# Altium PCB PCB1.PcbDoc
Units mm, origin at the board's own origin, x right, y up, seen from the top; angles counter-clockwise.
Board outline 85 x 40 mm, 2 copper layers (Top Layer, Bottom Layer); 43 components, 47 nets, 189 pads, 27 vias.
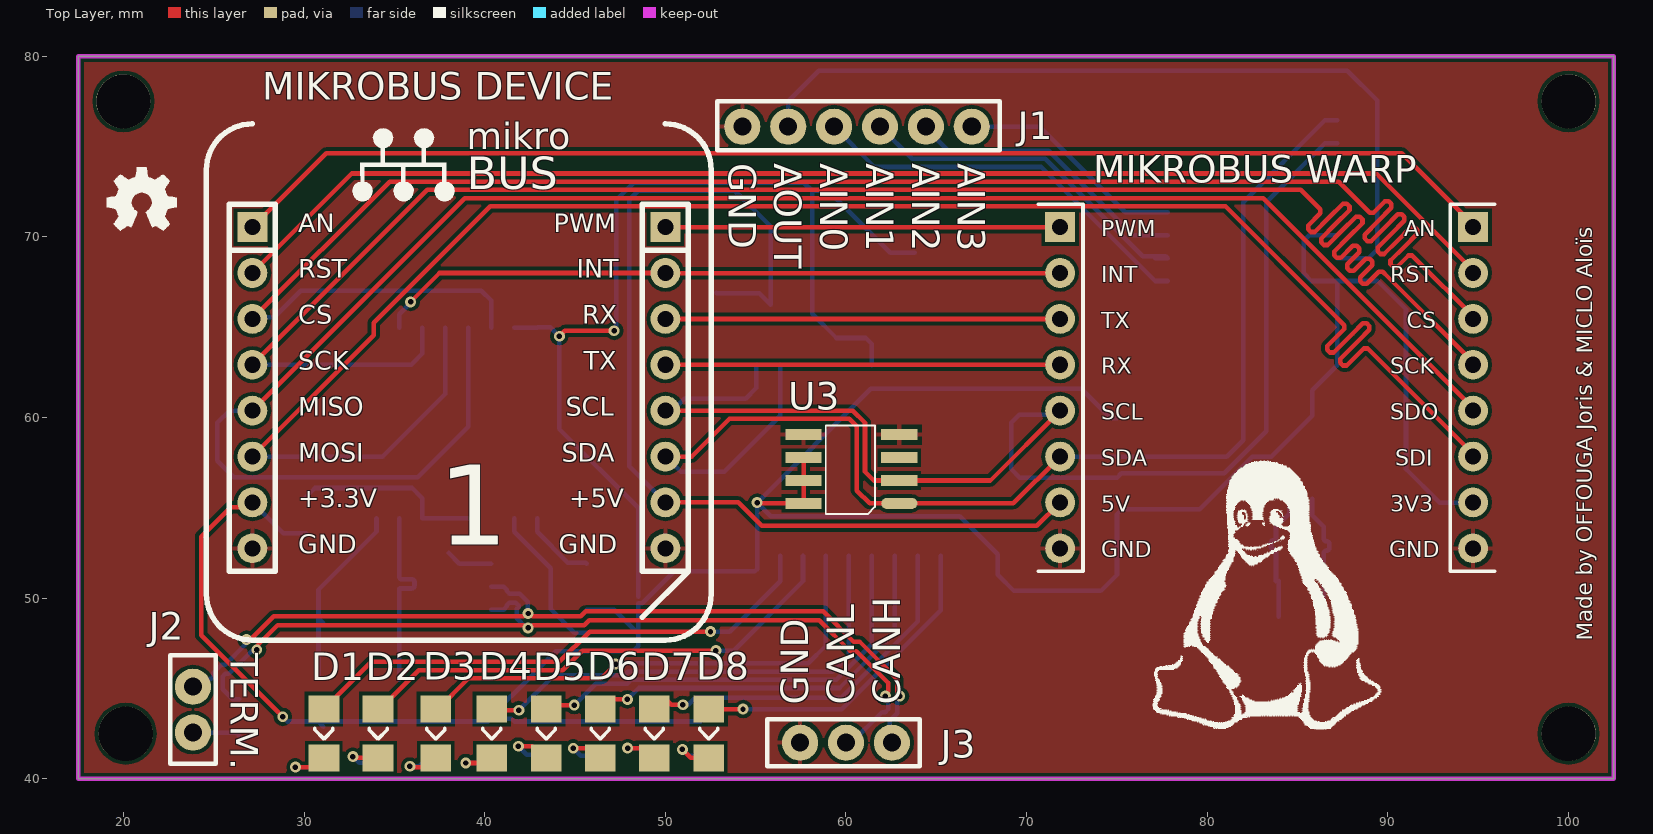
[diagram p0: Top Layer view]
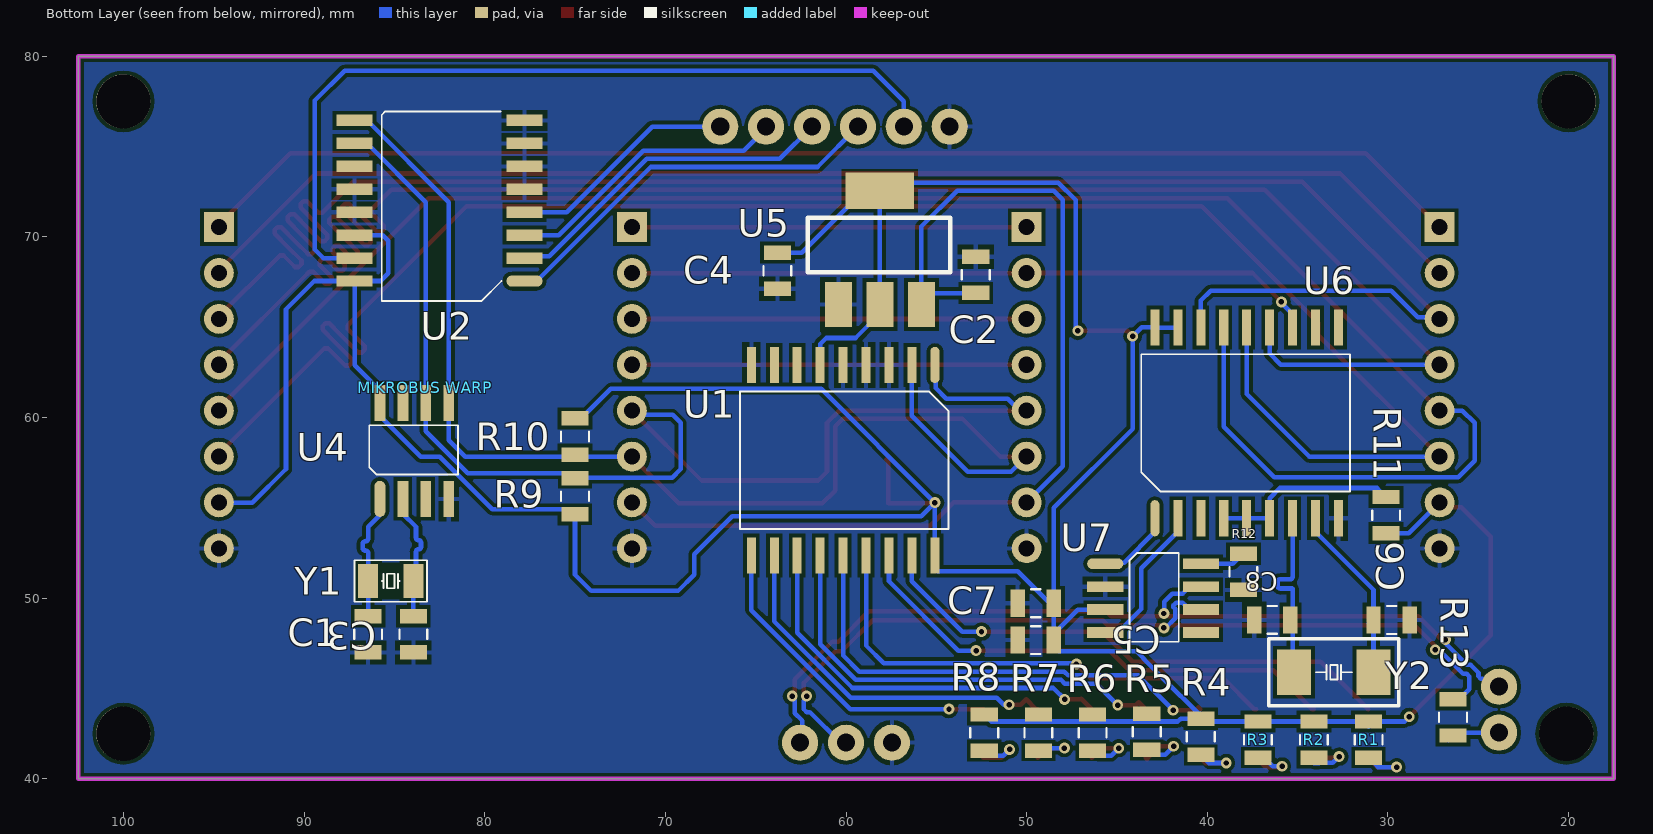
[diagram p1: Bottom Layer view, seen from below]

## Layer stack, top to bottom
Top Solder: solder mask 0.0102, Solder Resist, Dk 3.5
Top Layer: signal copper 0.0356
Dielectric 1: dielectric 0.32, FR-4, Dk 4.8
Bottom Layer: signal copper 0.0356
Bottom Solder: solder mask 0.0102, Solder Resist, Dk 3.5

## Board outline
17.5,40 17.5,80 102.5,80 102.5,40

## Design rules (kind name [scope] priority, off if disabled: settings)
Clearance [All] p1: gap=0.2 ignorepadtopadclearanceinfootprint=FALSE
DiffPairsRouting [All] p1: maxlimit=0.254 minlimit=0.254 mostfreqgap=0.254 toplayer_minwidth=0.25 toplayer_maxwidth=0.381 toplayer_prefwidth=0.25 bottomlayer_minwidth=0.25 bottomlayer_maxwidth=0.381 bottomlayer_prefwidth=0.25 maxuncoupledlength=12.7
HoleSize [All] p1: absolutevalues=TRUE maxlimit=5.5 minlimit=0.025 maxpercent=80.000 minpercent=20.000
MatchedLengths SPI_Length [InNetClass('SPI')] p1: tolerance=1 checknetsindiffpair=FALSE checkdiffpairvsdiffpair=TRUE checkxsignals=TRUE checkothers=TRUE
MatchedLengths QUARTZ_8M_Length [InNetClass('QUARTZ_8M')] p2: tolerance=0.1 checknetsindiffpair=FALSE checkdiffpairvsdiffpair=TRUE checkxsignals=TRUE checkothers=TRUE
MatchedLengths CAN [InNetClass('CAN')] p3: tolerance=0.1 checknetsindiffpair=FALSE checkdiffpairvsdiffpair=TRUE checkxsignals=TRUE checkothers=TRUE
MinimumSolderMaskSliver [All] p1: minsoldermaskwidth=0.05
PolygonConnect [All] p1: connectstyle=Relief reliefconductorwidth=0.254 reliefentries=4 polygonreliefangle="90 Angle" airgapwidth=0.254
RoutingVias [All] p1: holewidth=0.3 width=0.6 viastyle="Through Hole" minholewidth=0.3 minwidth=0.6 maxholewidth=0.3 maxwidth=0.6
SilkToSilkClearance [All] p1: silktosilkclearance=0.15
SilkToSolderMaskClearance [IsPad] p1: minsilkscreentomaskgap=0.1 clearancetoexposedcopper=TRUE
SolderMaskExpansion [All] p1: expansion=0.102
Width [All] p1: maxlimit=5 minlimit=0.254 preferedwidth=0.254
25 further rules are at their usual default settings.

## Classes and differential pairs
net class CAN: CAN_N CAN_P
net class QUARTZ_8M: NetC1_1 NetC3_1 OSC1 OSC2
net class UART: RX TX
net class SPI: CS MISO MOSI SCK
net class I2C: SCL SDA
differential pair CAN: +CAN_P -CAN_N

## Components (designator, comment, footprint, x,y, rotation, side; value= is the part's Value field where it differs from the comment)
C1 "6pF" 0805 86.45,48 r270 bottom
C2 "10uF" 0805 52.815,67.9 r90 bottom
C3 "6pF" 0805 83.95,48 r270 bottom
C4 "10uF" 0805 63.8,68.127 r270 bottom
C5 "18nF" 0805 49.5,47.68 r0 bottom
C6 "18pF" 0805 29.8,48.793 r0 bottom
C7 "100nF" 0805 49.5,49.72 r180 bottom
C8 "18pF" 0805 36.4,48.8 r180 bottom
D1 "Diode" LED 31.1,42.51 r90 top
D2 "Diode" LED 34.1,42.51 r90 top
D3 "Diode" LED 37.299,42.51 r90 top
D4 "Diode" LED 40.396,42.51 r90 top
D5 "Diode" LED 43.4,42.51 r90 top
D6 "Diode" LED 46.392,42.51 r90 top
D7 "Diode" LED 49.392,42.51 r90 top
D8 "Diode" LED 52.408,42.51 r90 top
J1 "Header_6" "HEADER 6" 60.61,76.1 r180 top
J2 "Jumper" "HEADER 2" 23.85,43.83 r270 top
J3 "Header_3" "HEADER 3" 60,42 r180 top
"MIKROBUS DEVICE" "MIKROBUS HOST CONN." "MIKROBUS HOST CONN." 27.14,70.54 r0 top
"MIKROBUS WARP" "MIKROBUS HOST CONN." "MIKROBUS WARP CONN." 94.71,70.54 r180 bottom
R1 "100R" 0805 31.073,42.173 r90 bottom
R2 "100R" 0805 34.1,42.173 r90 bottom
R3 "100R" 0805 37.2,42.173 r90 bottom
R4 "100R" 0805 40.36,42.327 r90 bottom
R5 "100R" 0805 43.35,42.6 r90 bottom
R6 "100R" 0805 46.35,42.56 r90 bottom
R7 "100R" 0805 49.35,42.56 r90 bottom
R8 "100R" 0805 52.35,42.56 r90 bottom
R9 "22K" 0805 75,55.65 r270 bottom
R10 "22K" 0805 75,58.95 r90 bottom
R11 "100K" 0805 30.107,54.6 r270 bottom
R12 "10R" 0805 38,51.46 r90 bottom
R13 "100R" 0805 26.4,43.4 r270 bottom
U1 "MCP23008" "SOIC 18" 60.16,57.634 r0 bottom
U2 "PCF8591T/2" "SOIC 16" 82.5,72 r90 bottom
U3 "LM75AD" "SOIC 8" 60.3,57.15 r90 top
U4 "MCP79410N" "SOIC 8" 83.895,58.15 r180 bottom
U5 "NCP1117LPST33T3G" SOT-223 58.124,69.4 r180 bottom
U6 "MCP2515" "SOIC 18" 37.82,59.7 r180 bottom
U7 "MCP2551" "SOIC 8" 43,50 r270 bottom
Y1 "32.768Khz" ABS-07 85.2,50.95 r180 bottom
Y2 "8MHz" QUARTZ_CMS_6.2x3.7 32.999,45.9 r0 bottom

## Footprints (in the part's own frame and the unit in brackets; to place one, negate y for a bottom-side part, rotate by r counter-clockwise, add the part's x,y. Pads: shape width x height; smd on the part's side, far side on the other; paste and mask are expansions set on the pad)
0805 [mm]
  rect 0.8x1.5 smd: 1(-1,0) 2(1,0)
  silkscreen extent -0.26,-0.77 0.26,0.77, body extent -0.97,-0.62 1.03,0.63, height 0.61
ABS-07 [mm]
  rect 1.1x1.9 smd: 1(-1.25,0) 2(1.25,0)
  Top Layer pour cut-out: -0.6,1 0.6,1 0.6,-1 -0.6,-1
  silkscreen extent -2,-1.15 2,1.15, body extent -1.61,-0.76 1.61,0.76, height 0.91
"HEADER 2" [mm]
  round 2 hole 1: 1(-1.27,0) 2(1.27,0)
  silkscreen extent -3,-1.26 3,1.27, body extent -2.54,-1.27 2.54,1.27, height 9.27
"HEADER 3" [mm]
  round 2 hole 1: 1(-2.54,0) 2(0,0) 3(2.54,0)
  silkscreen extent -4.09,-1.3 4.35,1.3, body extent -3.81,-1.27 3.81,1.27, height 8.77
"HEADER 6" [mm]
  round 2 hole 1: 1(-6.35,0) 2(-3.81,0) 3(-1.27,0) 4(1.27,0) 5(3.81,0) 6(6.35,0)
  silkscreen extent -7.9,-1.4 7.74,1.3, body extent -7.42,-9.61 7.42,0.4, height 2.5
LED [mm]
  rect 1.5x1.7 smd: 1(-1.35,0) 2(1.35,0)
  silkscreen extent -0.3,-0.5 0.3,0.5, body extent -1.6,-0.8 1.6,0.8, height 0.62
"MIKROBUS HOST CONN." [mil]
  rect 65x65 hole 35: 1(0,0) 16(900,0)
  round 65 hole 35: 2(0,-100) 3(0,-200) 4(0,-300) 5(0,-400) 6(0,-500) 7(0,-600) 8(0,-700) 9(900,-700) 10(900,-600) 11(900,-500) 12(900,-400) 13(900,-300) 14(900,-200) 15(900,-100)
  silkscreen extent -100,-900 1000,225, body extent -49,-755 949,55, height 335
"MIKROBUS WARP CONN." [mil]
  rect 65x65 hole 35: 1(0,0) 16(900,0)
  round 65 hole 35: 2(0,-100) 3(0,-200) 4(0,-300) 5(0,-400) 6(0,-500) 7(0,-600) 8(0,-700) 9(900,-700) 10(900,-600) 11(900,-500) 12(900,-400) 13(900,-300) 14(900,-200) 15(900,-100)
  body extent -49,-752 950,48, height 94
QUARTZ_CMS_6.2x3.7 [mm] "QUARTZ_CMS_6.2x3.7"
  rect 1.9x2.5 smd: 1(-2.2,0) 2(2.2,0)
  silkscreen extent -3.6,-1.85 3.6,1.85
"SOIC 8" [mm]
  oval 0.6x2 smd: 1(-1.905,-2.65)
  rect 0.6x2 smd: 2(-0.635,-2.65) 3(0.635,-2.65) 4(1.905,-2.65) 5(1.905,2.65) 6(0.635,2.65) 7(-0.635,2.65) 8(-1.905,2.65)
  silkscreen extent -2.49,-1.3 2.41,1.42, body extent -2.49,-3.05 2.51,3.15, height 1.75
"SOIC 16" [mm]
  oval 0.63x2 smd: 1(-4.445,-4.7)
  rect 0.63x2 smd: 2(-3.175,-4.7) 3(-1.905,-4.7) 4(-0.635,-4.7) 5(0.635,-4.7) 6(1.905,-4.7) 7(3.175,-4.7) 8(4.445,-4.7) 9(4.445,4.7) 10(3.175,4.7) 11(1.905,4.7) 12(0.635,4.7) 13(-0.635,4.7) 14(-1.905,4.7) 15(-3.175,4.7) 16(-4.445,4.7)
  silkscreen extent -5.56,-3.43 4.94,3.2, body extent -5.2,-5.11 5.3,5.52, height 3.22
"SOIC 18" [mm]
  oval 0.5x2 smd: 1(-5.08,-5.275)
  rect 0.5x2 smd: 2(-3.81,-5.275) 3(-2.54,-5.275) 4(-1.27,-5.275) 5(0,-5.275) 6(1.27,-5.275) 7(2.54,-5.275) 8(3.81,-5.275) 9(5.08,-5.275) 10(5.08,5.275) 11(3.81,5.275) 12(2.54,5.275) 13(1.27,5.275) 14(0,5.275) 15(-1.27,5.275) 16(-2.54,5.275) 17(-3.81,5.275) 18(-5.08,5.275)
  silkscreen extent -5.84,-3.8 5.71,3.8, body extent -5.84,-5.2 5.91,5.4, height 2.67
SOT-223 [mm]
  rect 1.5x2.5 smd: 1(-2.3,-3.15) 2(0,-3.15) 3(2.3,-3.15)
  rect 3.8x2 smd: 4(0,3.15)
  silkscreen extent -4,-1.35 3.9,1.65, body extent -3.15,-3.33 3.35,3.63, height 1.9

## Part data
C1 C3: library part Condensateur, "Condensateur", Supplier Part Number 1=1759185, Supplier 1=Farnell
C2 C4: library part Condensateur, "Condensateur", Supplier Part Number 1=9402144, Supplier 1=Farnell
C5: library part Condensateur, "Condensateur", Supplier Part Number 1=1759251, Supplier 1=Farnell
C6 C8: library part Condensateur, "Condensateur", Supplier Part Number 1=2310683, Supplier 1=Farnell
C7: library part Condensateur, "Condensateur", Supplier Part Number 1=2522443, Supplier 1=Farnell
D1 D2 D3 D4 D5 D6 D7 D8: "led", Supplier Part Number 1=2614990, Supplier 1=Farnell
J1: Supplier Part Number 1=2751311, Supplier 1=Farnell
J2: Supplier Part Number 1=9733302, Supplier 1=Farnell
J3: Supplier Part Number 1=9733450, Supplier 1=Farnell
"MIKROBUS DEVICE": library part "MIKROBUS HOST CONN._1", "mikroBUS Host Socket", Supplier Part Number 1=1593463, SMD=No, Supplier 1=Farnell
"MIKROBUS WARP": library part "MIKROBUS HOST CONN._1", "mikroBUS Host Socket", Supplier Part Number 1=9733345, SMD=No, Supplier 1=Farnell
R1 R2 R3 R4 R5 R6 R7 R8 R13: library part Resistance, Supplier Part Number 1=2693130, Supplier 1=Farnell
R9 R10: library part Resistance, Supplier Part Number 1=2447607, Supplier 1=Farnell
R11: library part Resistance, Supplier Part Number 1=2123382, Supplier 1=Farnell
R12: library part Resistance, Supplier Part Number 1=2446873, Supplier 1=Farnell
U1: Supplier Part Number 1=2851556, Supplier 1=Farnell
U2: Supplier Part Number 1=2400442, Supplier 1=Farnell
U3: Supplier Part Number 1=1854077, Supplier 1=Farnell
U4: library part MCP7940N, Supplier Part Number 1=2361122, Supplier 1=Farnell
U5: Supplier Part Number 1=2534283, Supplier 1=Farnell
U7: Supplier Part Number 1=1467746, Supplier 1=Farnell
Y1: library part Quartz, Supplier Part Number 1=2467864, Supplier 1=Farnell
Y2: library part Quartz, Supplier Part Number 1=2832065, Supplier 1=Farnell

## Free pads (board coordinates)
  round 3 hole 3: 0(20,77.5) 0(20.127,42.5) 0(100,42.5) 0(100,77.5)

## Via types
v1: diameter 0.6, hole 0.3, Top Layer to Bottom Layer, 27 vias

## Nets (pads, with @x,y where several pads share a name; then routed paths per layer and width w, separated by ;. In a path a pad name is that pad's centre, name@x,y a point inside that pad or via, vN(x,y) a via of type N, cw(c..) or ccw(c..) an arc to the next point about the centre after c; other vN are vias at no path point)
3.3v: "MIKROBUS DEVICE.7" "MIKROBUS WARP.7" C4.1 C5.1 C7.2 R1.2 R2.2 R3.2 R4.2 R5.2 R6.2 R7.2 R8.2 R9.2 R10.2 R11.2 U1.6 U1.18 U2.14 U2.16 U3.6 U3.7 U3.8 U4.8 U5.2 U5.4 U6.17 U6.18 U7.3 | length 229.1
  Top Layer w0.254: 27.14,55.3 26.873,55.033 25.933,55.033 24.3,53.4 24.3,47.956 28.598,43.658 ; v1(44.132,64.5) 44.432,64.8 v1(47.165,64.8) ; v1(55.08,55.289) 55.124,55.245 U3.8 U3.7 U3.6 U3.6@57.766,57.669
  Bottom Layer w0.254: 27.14,55.3 28.84,53.6 R11.2 ; v1(28.823,43.433) 29.083,43.173 R1.2@30.793,43.173 ; R1.2@31.073,42.893 R1.2@30.793,43.173 ; R4.2@40.36,43.6 40.463,43.6 41.44,44.577 41.469,44.577 43.504,46.612 43.504,46.641 43.92,47.057 48.227,47.057 48.5,47.33 C5.1 C5.1@48.5,48.03 ; U6.17 U6.18 42.92,64.995 43.637,64.995 v1(44.132,64.5) 44.132,59.368 48.5,55 C7.2@48.5,50.07 ; U7.3 47.165,49.365 C5.1@48.5,48.03 ; v1(47.165,64.8) 47.289,64.924 47.289,72.04 48.253,73.004 57.67,73.004 U5.4 ; R8.2 51.963,43.173 41.633,43.173 41.479,43.327 R4.2 40.206,43.173 R3.2 R2.2 R1.2 R1.2@30.793,43.173 ; U1.6 61.43,64.07 61.1,64.4 59.474,64.4 58.124,65.75 U5.2 U5.4 ; C4.1 62.447,69.127 59.024,72.55 U5.4 ; R10.2 74.65,59.95 73.018,61.582 61.373,61.582 v1(55.08,55.289) ; U2.14 85.639,70.095 85.328,69.784 85.328,67.989 85.762,67.555 U2.16 ; 94.71,55.289 92.861,55.289 91,57.15 91,66 89.445,67.555 U2.16 ; C5.1@48.5,48.03 C7.2 48.72,49.72 50.486,51.486 54.957,51.486 55.08,51.609 U1.18 v1(55.08,55.289) ; v1(55.08,55.289) 55.839,54.53 66.3,54.53 68.4,52.43 68.4,51.3 69.3,50.4 74.1,50.4 75,51.3 R9.2 75.273,54.923 79.575,54.923 82.481,57.829 83.529,57.829 85.8,60.1 U4.8 85.8,61.5 87.2,62.9 U2.16
5v: "MIKROBUS DEVICE.10" "MIKROBUS WARP.10" C2.1 U5.3 | length 57
  Top Layer w0.254: 50,55.3 54.039,55.3 55.339,54 70.561,54 71.85,55.289
  Bottom Layer w0.254: 50,55.3 48,57.3 48,72.05 48.5,72.55 53.85,72.55 55.824,70.576 U5.3 55.201,66.873 52.842,66.873 C2.1
AIN0: J1.4 U2.1 | length 22
  Bottom Layer w0.254: J1.4 61.575,73.865 70.805,73.865 77.115,67.555 U2.1
AIN1: J1.3 U2.2 | length 19.6
  Bottom Layer w0.254: J1.3 63.661,74.319 71.035,74.319 76.419,68.935 77.69,68.935 U2.2 U2.2@77.115,68.825
AIN2: J1.2 U2.3 | length 15.9
  Bottom Layer w0.254: J1.2 64.42,76.015 65.662,74.773 71.223,74.773 75.901,70.095 U2.3
AIN3: J1.1 U2.4 | length 12.8
  Bottom Layer w0.254: J1.1 70.726,76.1 75.461,71.365 U2.4
AN: "MIKROBUS DEVICE.1" "MIKROBUS WARP.1" | length 71.1
  Top Layer w0.254: 27.14,70.54 31.227,74.627 90.773,74.627 94.86,70.54
AOUT: J1.5 U2.15 | length 46
  Bottom Layer w0.254: J1.5 56.8,77.5 58.5,79.2 87.75,79.2 89.4,77.55 89.4,69.3 88.925,68.825 U2.15
CAN_N: J3.2 R13.1 U7.6 | length 49.4
  Top Layer w0.25: v1(27.387,47.143) 27.454,47.21 27.454,47.419 28.535,48.5 41.775,48.5 42.157,48.5 42.305,48.352 v1(42.4,48.352) 42.495,48.352 42.643,48.5 45.52,48.5 45.795,48.775 58.525,48.775 60.225,47.075 60.565,47.075 62.326,45.313 62.326,44.82 62.178,44.672 v1(62.178,44.577) v1@62.191,44.59
  Bottom Layer w0.25: R13.1 26.05,44.4 25.492,44.958 25.492,45.665 25.639,45.811 25.846,45.811 27.111,47.076 27.32,47.076 v1(27.387,47.143) ; U7.6 41.05,49.365 41.225,49.54 41.225,49.602 41.371,49.748 41.727,49.748 41.873,49.602 41.873,49.509 41.775,49.411 41.775,48.893 42.316,48.352 v1(42.4,48.352) ; J3.2 60.299,42 61.993,43.695 62.18,43.695 62.326,43.841 v1@62.326,44.334
CAN_P: J2.1 J3.1 U7.7 | length 49.4
  Top Layer w0.25: v1(26.821,47.709) 26.888,47.776 27.098,47.776 28.326,49.004 41.566,49.004 42.157,49.004 42.305,49.152 v1(42.4,49.152) 42.495,49.152 42.643,49.004 45.311,49.004 45.586,49.279 58.734,49.279 60.434,47.579 60.773,47.579 62.83,45.522 62.83,44.82 62.978,44.672 v1(62.978,44.577) v1@62.911,44.644
  Bottom Layer w0.25: J2.1 24.324,45.1 24.76,45.536 24.858,45.536 24.988,45.666 24.988,45.873 25.43,46.315 25.637,46.315 26.754,47.432 26.754,47.642 v1(26.821,47.709) ; U7.7 41.05,50.635 41.225,50.46 41.225,50.398 41.371,50.252 41.935,50.252 42.377,49.81 42.377,49.175 v1(42.4,49.152) ; J3.1 62.426,42.114 62.426,43.229 62.83,43.632 v1@62.83,44.334
CS: "MIKROBUS DEVICE.3" "MIKROBUS WARP.3" U6.16 | length 102.8
  Top Layer w0.254: 27.14,65.46 34.734,73.054 87.266,73.054 88.91,71.41 88.982,71.338 89.197,71.338 89.833,71.974 90.049,71.974 90.192,71.83 90.192,71.615 89.449,70.871 88.705,70.128 88.705,69.912 88.849,69.768 89.064,69.768 89.808,70.512 90.552,71.256 90.767,71.256 90.911,71.112 90.911,70.896 90.167,70.153 89.424,69.409 89.424,69.194 89.567,69.05 89.783,69.05 90.526,69.794 91.27,70.537 91.486,70.537 91.629,70.393 91.629,70.178 90.886,69.434 90.142,68.691 90.142,68.475 90.286,68.332 90.501,68.332 91.137,68.967 91.353,68.967 91.41,68.91 94.86,65.46
  Bottom Layer w0.254: 27.14,65.46 27.226,65.547 28.346,65.547 29.827,67.027 39.811,67.027 40.36,66.478 U6.16
GND: "MIKROBUS DEVICE.8" "MIKROBUS DEVICE.9" "MIKROBUS WARP.8" "MIKROBUS WARP.9" C1.2 C2.2 C3.2 C4.2 C5.2 C6.1 C7.1 C8.1 J1.6 J3.3 R12.1 U1.3 U1.4 U1.5 U1.9 U2.5 U2.6 U2.7 U2.8 U2.12 U2.13 U3.4 U3.5 U4.4 U5.1 U6.9 U7.2
INT: "MIKROBUS DEVICE.15" "MIKROBUS WARP.15" U6.12 | length 38.2
  Top Layer w0.254: v1(35.9,66.4) v1@35.966,66.334 ; v1@36.005,66.505 37.5,68 50,68 50.006,67.994 71.844,67.994 71.85,67.989
  Bottom Layer w0.254: U6.12 35.28,65.725 35.9,66.345 v1(35.9,66.4)
MISO: "MIKROBUS DEVICE.5" "MIKROBUS WARP.5" U6.15 | length 102.7
  Top Layer w0.254: 27.14,60.38 38.906,72.147 83.094,72.147 94.86,60.38
  Bottom Layer w0.254: 27.14,60.38 25.88,60.38 25.2,59.7 25.2,57.6 26.112,56.688 36.288,56.688 39.09,59.49 U6.15
MOSI: "MIKROBUS DEVICE.6" "MIKROBUS WARP.6" U6.14 | length 103.1
  Top Layer w0.254: 27.14,57.84 33.857,64.557 33.857,65.243 40.306,71.693 81.008,71.693 86.75,65.95 87.585,65.115 87.585,64.899 86.644,63.959 86.644,63.743 86.788,63.599 87.003,63.599 88.052,64.648 88.613,65.209 88.828,65.209 88.972,65.065 88.972,64.85 88.411,64.289 87.362,63.24 87.362,63.025 87.506,62.881 87.722,62.881 88.663,63.822 88.878,63.822 88.95,63.75 94.86,57.84
  Bottom Layer w0.254: 27.14,57.84 34.36,57.84 37.82,61.3 U6.14
NetC1_1: C1.1 U4.1 Y1.1 | length 7.2
  Bottom Layer w0.254: U4.1 85.8,54.6 86.45,53.95 86.45,53.4 86.45,53.298 ccw(c86.602,53.298) 86.602,53.146 cw(c86.602,52.994) 86.755,52.994 86.755,52.79 cw(c86.602,52.79) 86.602,52.638 ccw(c86.602,52.486) 86.45,52.486 86.45,51.9 Y1.1 C1.1@86.45,48.95
NetC3_1: C3.1 U4.2 Y1.2 | length 7.2
  Bottom Layer w0.254: Y1.2@83.8,50.95 83.8,52.45 83.8,52.577 ccw(c83.673,52.577) 83.673,52.704 83.653,52.704 cw(c83.653,52.831) 83.526,52.831 83.526,53.085 cw(c83.653,53.085) 83.653,53.212 83.673,53.212 ccw(c83.673,53.339) 83.8,53.339 83.8,53.5 83.8,53.95 84.53,54.68 U4.2 ; C3.1@83.95,48.965 Y1.2
NetD1_1: D1.1 R1.1 | length 3.6
  Top Layer w0.254: v1@29.5,40.653 v1(29.523,40.653) 30.592,40.653 D1.1
  Bottom Layer w0.254: v1(29.523,40.653) 30.553,40.653 R1.1
NetD1_2: D1.2 U1.17 | length 29.6
  Top Layer w0.254: D1.2 33.713,46.473 44.132,46.473 45.809,48.15 v1(52.5,48.15)
  Bottom Layer w0.254: v1(52.5,48.15) 53.571,48.15 56.35,50.929 U1.17
NetD2_1: D2.1 R2.1 | length 3
  Top Layer w0.254: v1@32.655,41.16 D2.1
  Bottom Layer w0.254: v1(32.705,41.231) 33.049,40.887 33.827,40.887 33.811,40.871 R2.1@34.1,40.871
NetD2_2: D2.2 U1.16 | length 27.9
  Top Layer w0.254: D2.2 34.2,43.86 36.359,46.019 44.32,46.019 45.401,47.1 v1(52.8,47.1)
  Bottom Layer w0.254: v1(52.8,47.1) 53.791,47.1 57.62,50.929 U1.16
NetD3_1: D3.1 R3.1 | length 3.2
  Top Layer w0.254: v1@35.86,40.653 36.792,40.653 D3.1
  Bottom Layer w0.254: v1(35.86,40.693) 36.37,40.693 36.85,41.173 R3.1
NetD3_2: D3.2 U1.15 | length 28
  Top Layer w0.254: D3.2 37.399,43.86 39.104,45.565 46.465,45.565 v1(47.25,46.35)
  Bottom Layer w0.254: v1(47.25,46.35) 47.289,46.389 57.9,46.389 58.89,47.379 U1.15
NetD4_1: D4.1 R4.1 | length 2.9
  Top Layer w0.254: v1@39.228,40.877 40.114,40.877 D4.1
  Bottom Layer w0.254: v1(38.955,40.877) 39.91,40.877 R4.1
NetD4_2: D4.2 U1.14 | length 26.6
  Top Layer w0.254: D4.2 40.486,43.95 40.636,43.8 v1(41.893,43.8)
  Bottom Layer w0.254: v1(41.893,43.8) 43.816,45.723 47.697,45.723 47.909,45.935 59.267,45.935 60.16,46.828 U1.14
NetD5_1: D5.1 R5.1 | length 3.6
  Top Layer w0.254: v1(41.866,41.8) 42.64,41.8 43.34,41.1 D5.1
  Bottom Layer w0.254: v1(41.866,41.8) 42.339,41.327 43.077,41.327 R5.1
NetD5_2: D5.2 U1.13 | length 24.6
  Top Layer w0.254: D5.2 43.79,44.25 43.962,44.078 v1(44.955,44.078)
  Bottom Layer w0.254: v1(44.955,44.078) 46.146,45.269 47.885,45.269 48.097,45.481 59.455,45.481 61.43,47.456 U1.13
NetD6_1: D6.1 R6.1 | length 3.4
  Top Layer w0.254: v1(44.9,41.697) 45.855,41.697 D6.1
  Bottom Layer w0.254: v1(44.9,41.697) 45.31,41.287 46.077,41.287 R6.1
NetD6_2: D6.2 U1.12 | length 22.4
  Top Layer w0.254: D6.2 46.974,44.442 47.016,44.4 v1(47.9,44.4)
  Bottom Layer w0.254: v1(47.9,44.4) 48.527,45.027 59.643,45.027 62.7,48.084 U1.12
NetD7_1: D7.1 R7.1 | length 3.3
  Top Layer w0.254: v1(47.909,41.7) 48.852,41.7 D7.1
  Bottom Layer w0.254: v1(47.909,41.7) 49.09,41.7 49.29,41.5 R7.1
NetD7_2: D7.2 U1.11 | length 20.5
  Top Layer w0.254: D7.2 49.492,43.86 50.032,44.4 50.332,44.1 v1(50.975,44.1)
  Bottom Layer w0.254: v1(50.975,44.1) 51.278,44.1 51.665,44.487 59.745,44.487 63.97,48.712 U1.11
NetD8_1: D8.1 R8.1 | length 3.3
  Top Layer w0.254: v1(50.943,41.631) 51.414,41.16 D8.1
  Bottom Layer w0.254: v1(50.943,41.631) 51.287,41.287 52.077,41.287 R8.1
NetD8_2: D8.2 U1.10 | length 18.1
  Top Layer w0.254: D8.2 v1(54.3,43.86)
  Bottom Layer w0.254: v1(54.3,43.86) 59.76,43.86 65.24,49.34 U1.10
NetJ2_2: J2.2 R13.2 | length 3
  Bottom Layer w0.254: J2.2 26.24,42.56 R13.2 R13.2@26.673,42.127
NetR11_1: R11.1 U6.4 U6.5 U6.6 | length 10.5
  Bottom Layer w0.254: R11.1 30.607,56.1 35.988,56.1 36.55,55.537 U6.6 U6.5 U6.4
NetR12_2: R12.2 U7.8 | length 2.6
  Bottom Layer w0.254: R12.2@38,52.5 38.595,51.905 U7.8
OSC1: C6.2 U6.8 Y2.1 | length 10.4
  Bottom Layer w0.254: Y2.1@30.8,45.6 C6.2 30.8,50.465 34.01,53.675 U6.8 ; C6.2@30.9,48.793 C6.2@31.073,48.62
OSC2: C8.2 U6.7 Y2.2 | length 10.4
  Bottom Layer w0.254: Y2.2@35.28,45.481 35.28,50.5 cw(c35.318,50.5) 35.318,50.538 35.962,50.538 ccw(c35.962,50.69) 36.114,50.69 36.114,50.894 ccw(c35.962,50.894) 35.962,51.046 35.432,51.046 cw(c35.432,51.198) 35.28,51.198 35.28,51.3 U6.7
PWM: "MIKROBUS DEVICE.16" "MIKROBUS WARP.16" | length 21.9
  Top Layer w0.254: 50,70.54 71.839,70.54 71.85,70.529
RST: "MIKROBUS DEVICE.2" "MIKROBUS WARP.2" | length 72.3
  Top Layer w0.254: 27.14,68 32.648,73.508 89.352,73.508 94.86,68
RX: "MIKROBUS DEVICE.14" "MIKROBUS WARP.14" | length 21.9
  Top Layer w0.254: 50,65.46 50.006,65.454 71.844,65.454 71.85,65.449
RXCAN: U6.2 U7.4 | length 8.4
  Bottom Layer w0.254: U6.2 41.63,53.675 43.65,51.655 43.65,49.4 44.955,48.095 U7.4
SCK: "MIKROBUS DEVICE.4" "MIKROBUS WARP.4" U6.13 | length 102.7
  Top Layer w0.254: 27.14,62.92 36.82,72.6 85.18,72.6 86.26,71.52 86.26,71.305 85.584,70.629 85.584,70.413 85.727,70.27 85.943,70.27 86.727,71.053 87.51,71.837 87.726,71.837 87.87,71.693 87.87,71.478 87.086,70.694 86.302,69.91 86.302,69.695 86.446,69.551 86.661,69.551 87.445,70.335 88.229,71.119 88.444,71.119 88.588,70.975 88.588,70.759 87.804,69.976 87.021,69.192 87.021,68.976 87.164,68.833 87.38,68.833 88.056,69.509 88.271,69.509 88.415,69.365 88.415,69.149 87.739,68.474 87.739,68.258 87.883,68.114 88.098,68.114 88.774,68.79 88.99,68.79 89.133,68.647 89.133,68.431 88.457,67.755 88.457,67.54 88.601,67.396 88.817,67.396 89.493,68.072 89.708,68.072 89.78,68 94.86,62.92
  Bottom Layer w0.254: 27.14,62.92 35.925,62.92 36.55,63.545 U6.13
SCL: "MIKROBUS DEVICE.12" "MIKROBUS WARP.12" R9.1 U1.1 U2.10 U3.2 U4.6 | length 72.3
  Top Layer w0.254: 50,60.38 60.37,60.38 61.05,59.7 61.05,57 61.535,56.515 U3.2 67.996,56.515 71.85,60.369
  Bottom Layer w0.254: 50,60.38 50.366,60.38 51.036,61.05 54.45,61.05 55.033,61.633 55.033,62.862 U1.1 ; 71.85,60.369 71.631,60.15 69.6,60.15 69.15,59.7 69.15,57.15 69.624,56.676 75,56.676 75.247,56.923 76.5,56.923 79.9,56.923 80.933,56.923 83.26,59.25 U4.6 83.26,71.92 86.515,75.175 U2.10
SDA: "MIKROBUS DEVICE.11" "MIKROBUS WARP.11" R10.1 U1.2 U2.9 U3.1 U4.5 | length 78.2
  Top Layer w0.254: 50,57.84 51.464,57.84 53.55,59.926 60.182,59.926 60.596,59.512 60.596,55.954 61.305,55.245 U3.1 69.266,55.245 71.85,57.829
  Bottom Layer w0.254: 50,57.84 50.026,57.84 50.866,57 53.25,57 56.35,60.1 U1.2 ; R10.1@75,57.829 71.85,57.829 ; 77.5,57.829 71.85,57.829 ; U2.9 86.515,76.445 81.99,71.92 U4.5 81.99,58.74 81.079,57.829 80.6,57.829 71.85,57.829
TX: "MIKROBUS DEVICE.13" "MIKROBUS WARP.13" | length 21.9
  Top Layer w0.254: 50,62.92 71.839,62.92 71.85,62.909
TXCAN: U6.1 U7.1 | length 4.2
  Bottom Layer w0.254: U6.1 42.9,53.675 44.604,51.971 45.584,51.971 U7.1
pads on no net: U1.7 U1.8 U2.11 U3.3 U4.3 U4.7 U6.3 U6.10 U6.11 U7.5

## Polygon pours and split planes (outlines as drawn)
GND on Bottom Layer "GND_L02_P000" (solid, remove dead copper, pour order 0): 17.5,80 102.5,80 102.5,40 17.5,40
GND on Top Layer "GND_L01_P002" (solid, remove dead copper, pour order 2): 17.5,80 102.5,80 102.5,40 17.5,40

## Keep-outs
Keep-Out Layer:
  the board outline again, w0.254

## Silkscreen, mask and mechanical layers (free items; w line width, h text height)
Top Overlay:
  drawing of 4 lines, arcs and shapes, not listed
  text "Made by OFFOUGA Joris & MICLO Aloïs" at 101.6,47.635 h1.5 r90
  text "TERM." at 25.95,46.95 h1.52 r270
  text "GND" at 57.912,44.1 h1.52 r90
  text "CANL" at 60.452,44.1 h1.52 r90
  text "CANH" at 62.992,44.1 h1.52 r90

## Text inside footprints (layer, text, board x,y; h text height)
J1: Top Overlay "GND" at 53.498,74.068 h1.52 r270; Top Overlay "AOUT" at 56.038,74.068 h1.52 r270; Top Overlay "AIN0" at 58.578,74.068 h1.52 r270; Top Overlay "AIN1" at 61.118,74.068 h1.52 r270; Top Overlay "AIN2" at 63.658,74.068 h1.52 r270; Top Overlay "AIN3" at 66.198,74.068 h1.52 r270
"MIKROBUS DEVICE": Top Overlay "SDA" at 44.267,57.205 h1.78; Top Overlay "RST" at 29.68,67.365 h1.78; Top Overlay "CS" at 29.68,64.825 h1.78; Top Overlay "MISO" at 29.68,59.745 h1.78; Top Overlay "SCK" at 29.68,62.285 h1.78; Top Overlay "MOSI" at 29.68,57.205 h1.78; Top Overlay "+3.3V" at 29.68,54.665 h1.78; Top Overlay "GND" at 29.68,52.125 h1.78; Top Overlay "SCL" at 44.5,59.745 h1.78; Top Overlay "INT" at 45.085,67.365 h1.78; Top Overlay "RX" at 45.394,64.825 h1.78; Top Overlay "TX" at 45.483,62.285 h1.78; Top Overlay "GND" at 44.107,52.125 h1.78; Top Overlay "+5V" at 44.691,54.665 h1.78; Top Overlay "AN" at 29.68,69.905 h1.78; Top Overlay "PWM" at 43.822,69.905 h1.78; Top Overlay "mikro" at 39.002,74.364 h2.51; Top Overlay "BUS" at 39.002,72.026 h3.09; Top Overlay "1" at 37.427,51.49 h7.62
"MIKROBUS WARP": Top Overlay "GND" at 74.136,52.252 h0.89; Top Overlay "SCL" at 74.136,59.872 h0.89; Top Overlay "INT" at 74.136,67.492 h0.89; Top Overlay "SDI" at 90.392,57.332 h0.89; Top Overlay "CS" at 91.027,64.952 h0.89; Top Overlay "GND" at 90.062,52.252 h0.89; Top Overlay "3V3" at 90.138,54.792 h0.89; Top Overlay "SDO" at 90.138,59.872 h0.89; Top Overlay "SDA" at 74.136,57.332 h0.89; Top Overlay "RST" at 90.138,67.492 h0.89; Top Overlay "PWM" at 74.136,70.032 h0.89; Top Overlay "5V" at 74.136,54.792 h0.89; Top Overlay "RX" at 74.136,62.412 h0.89; Top Overlay "TX" at 74.136,64.952 h0.89; Top Overlay "AN" at 90.9,70.032 h0.89; Top Overlay "SCK" at 90.138,62.412 h0.89